# Altium PCB W25 Chipset - 1GBiT SPI.PcbDoc
Units mm, origin at the board's own origin, x right, y up, seen from the top; angles counter-clockwise.
Board outline 30.95 x 25.24 mm, 2 copper layers (Top Layer, Bottom Layer); 9 components, 13 nets, 38 pads, 6 vias.
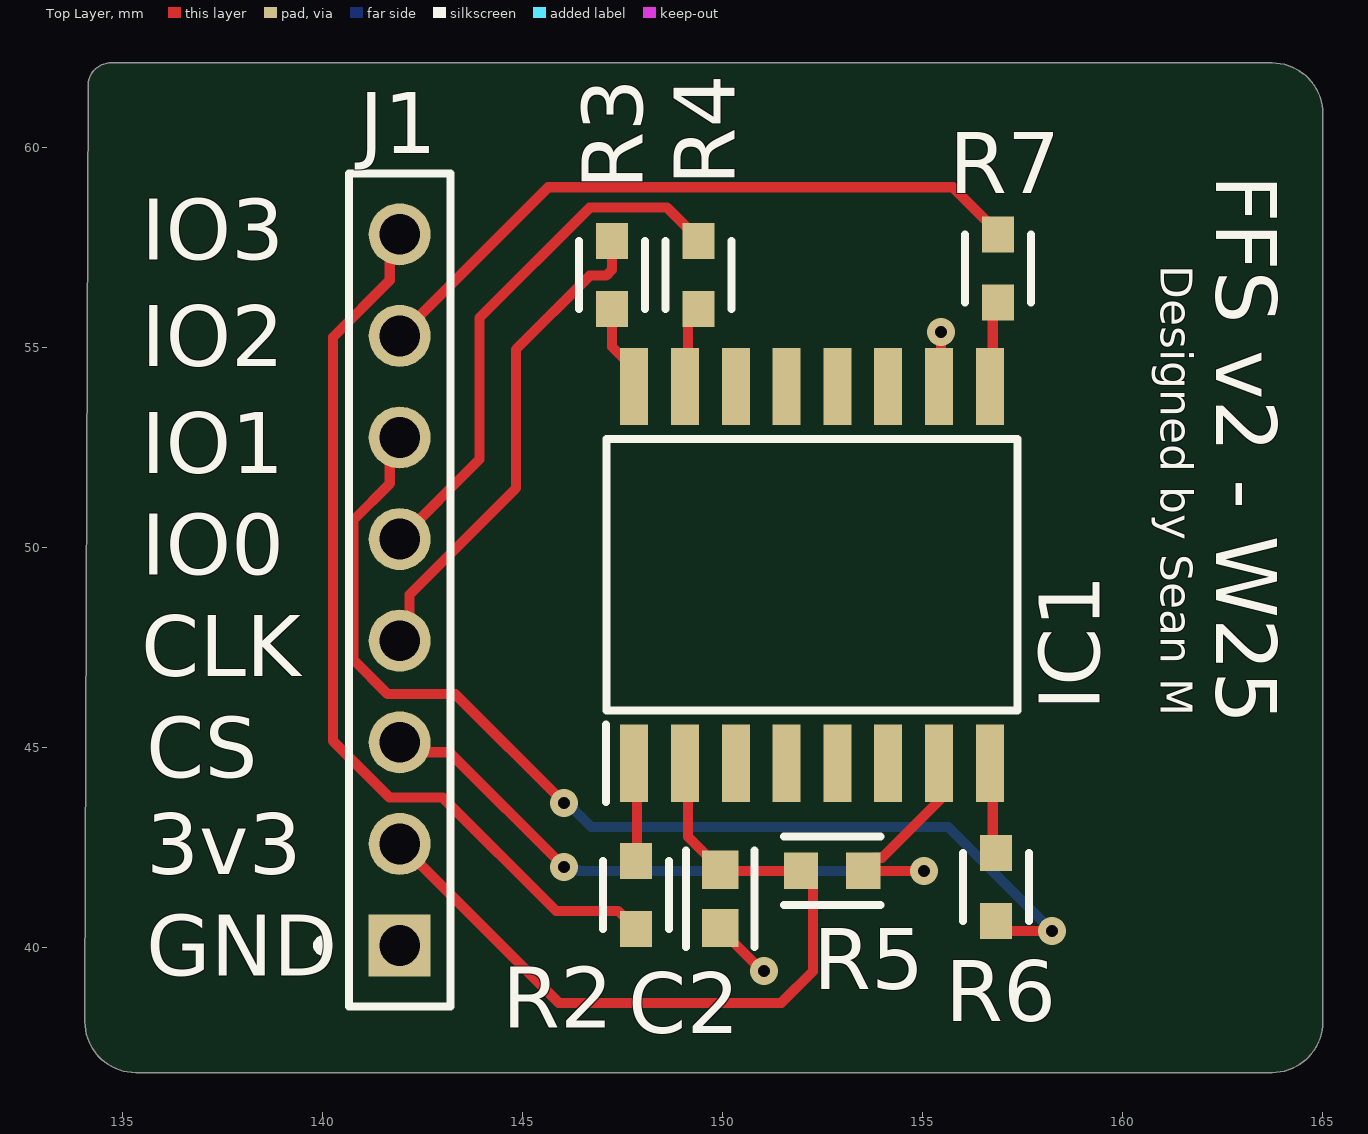
[diagram p0: Top Layer view]
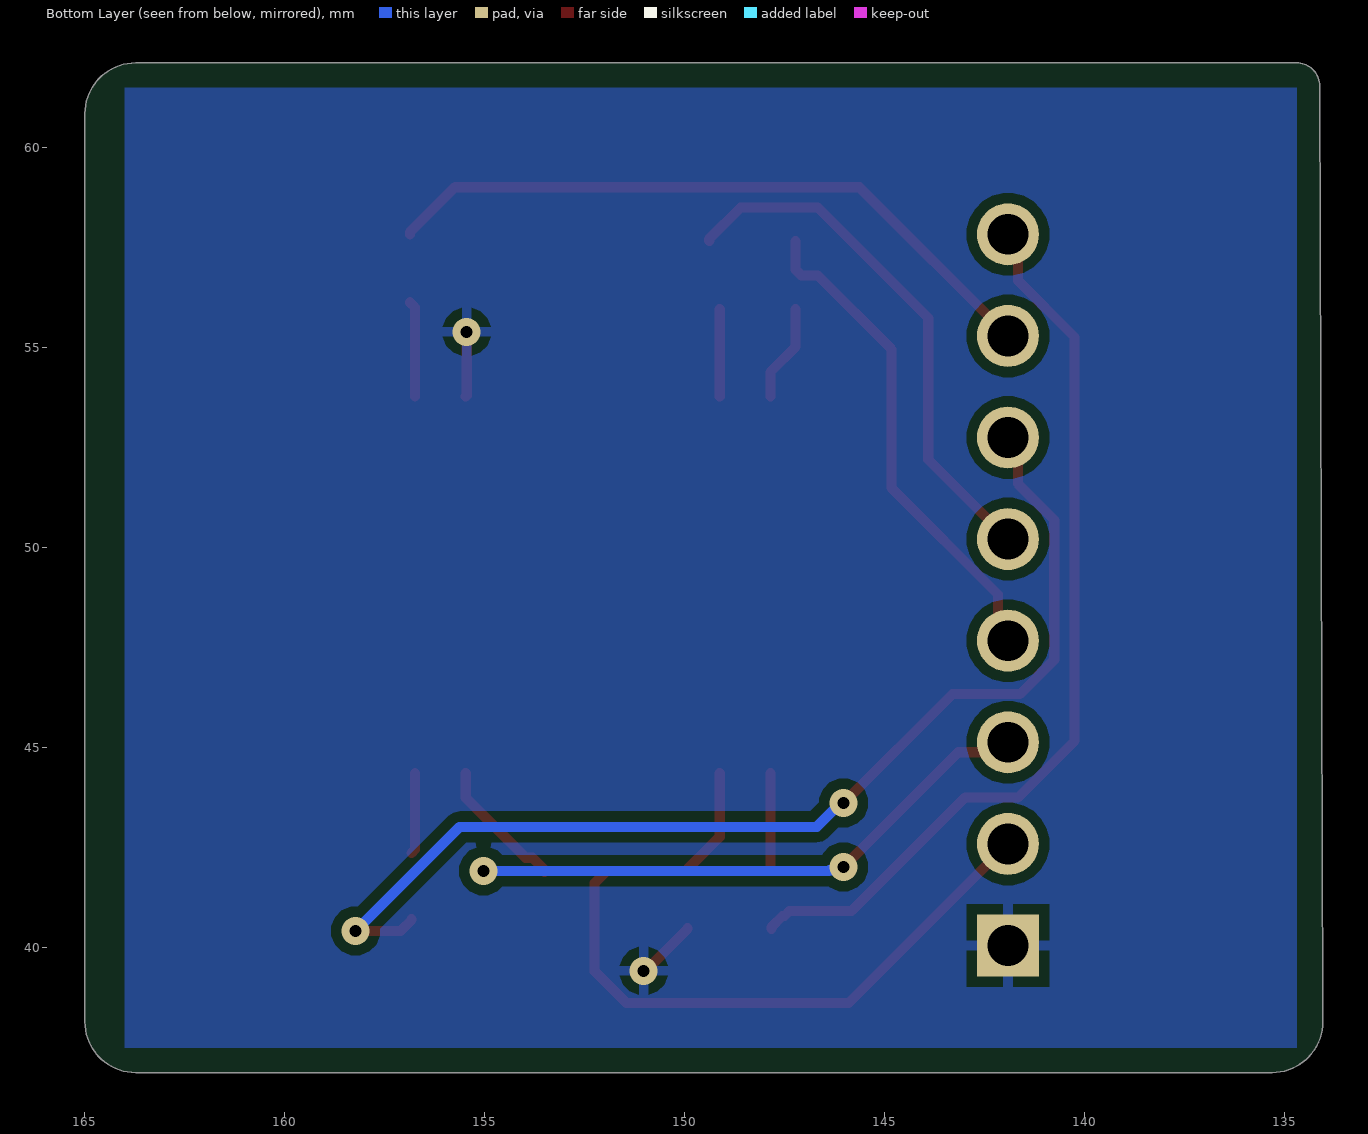
[diagram p1: Bottom Layer view, seen from below]
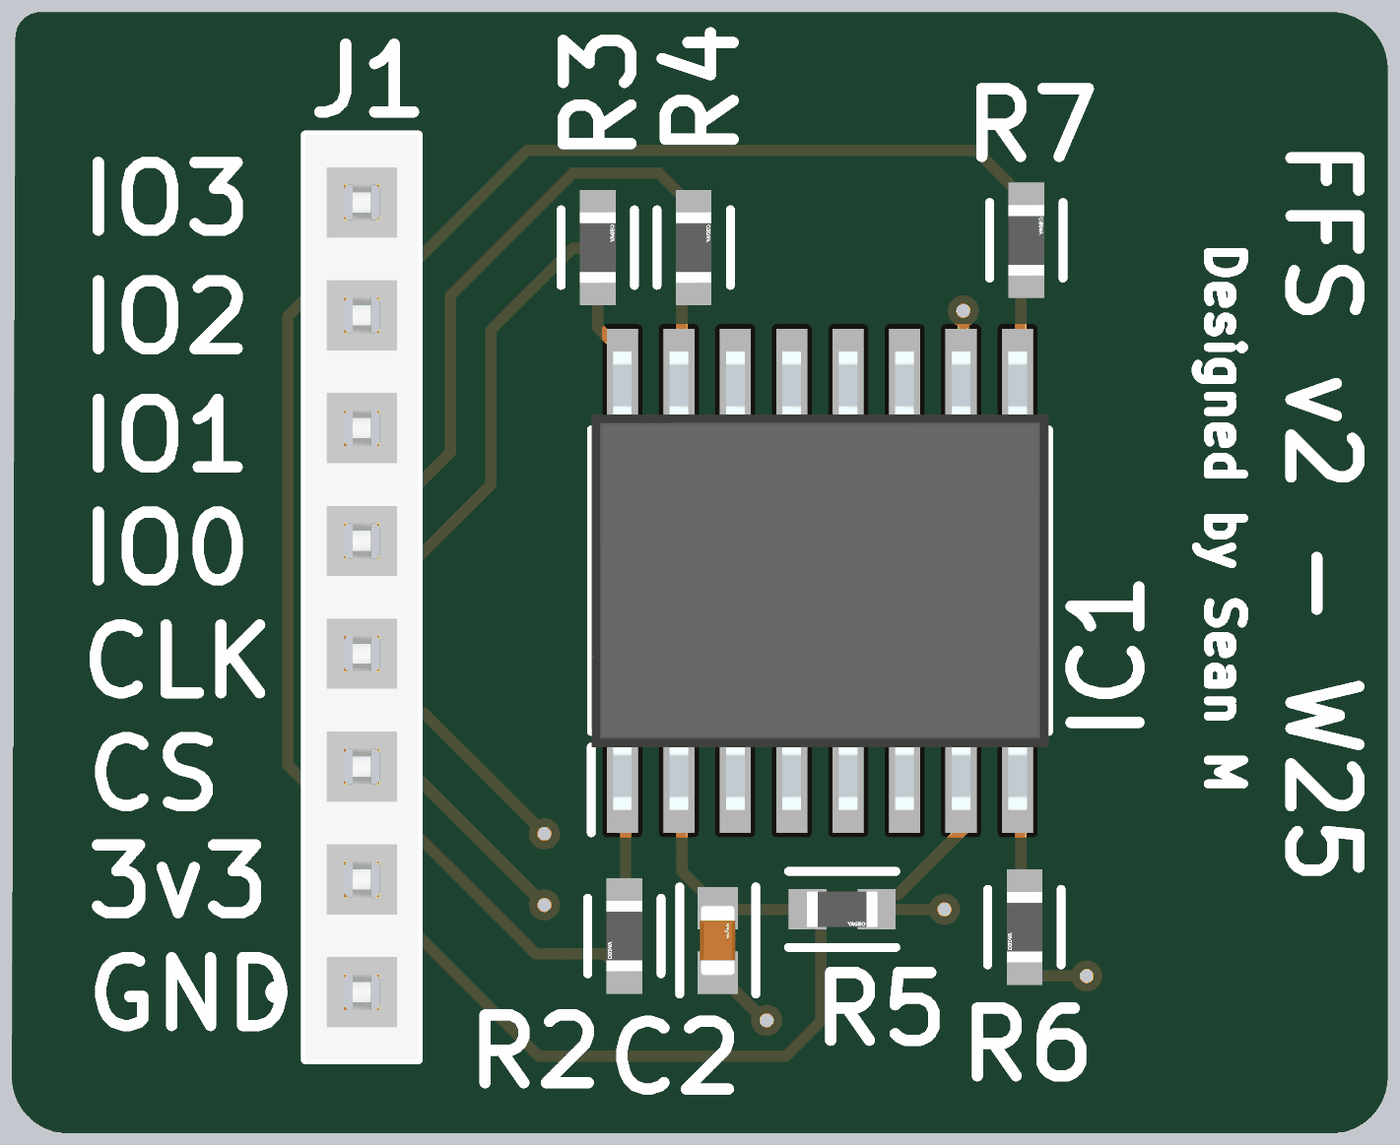
[diagram p2: 3D render of the assembled board from above, using the file's embedded part models]

## Layer stack, top to bottom
Top Solder: solder mask 0.0102, Solder Resist, Dk 3.5
Top Layer: signal copper 0.0356
Dielectric 1: dielectric 0.32, FR-4, Dk 4.8
Bottom Layer: signal copper 0.0356
Bottom Solder: solder mask 0.0102, Solder Resist, Dk 3.5

## Board outline
134.052,38.149 ccw(c135.322,38.149) 135.322,36.879 163.73,36.879 ccw(c163.73,38.149) 165,38.149 165,60.851 ccw(c163.73,60.851) 163.73,62.121 134.701,62.121 ccw(c134.701,61.551) 134.131,61.551 134.052,38.598

## Design rules (kind name [scope] priority, off if disabled: settings)
Clearance [All] p1: gap=0.254 ignorepadtopadclearanceinfootprint=FALSE ismatrix=TRUE
HoleSize [All] p1: absolutevalues=TRUE maxlimit=2.54 minlimit=0.003 maxpercent=80.000 minpercent=20.000
PolygonConnect [All] p1: connectstyle=Relief reliefconductorwidth=0.254 reliefentries=4 polygonreliefangle="90 Angle" airgapwidth=0.254
RoutingVias [All] p1: holewidth=0.711 width=1.27 viastyle="Through Hole" minholewidth=0.711 minwidth=1.27 maxholewidth=0.711 maxwidth=1.27
SolderMaskExpansion [All] p1: expansion=0.102 istentingtop=FALSE
Width [All] p1: maxlimit=0.254 minlimit=0.254 preferedwidth=0.254
29 further rules are at their usual default settings.

## Classes and differential pairs
component class "W25 Chipset - 1GBiT SPI": C2 IC1 J1 R2 R3 R5 R6 R7

## Components (designator, comment, footprint, x,y, rotation, side; value= is the part's Value field where it differs from the comment)
C2 "GCM188R71" FP-GCM188-0_1-IPC_B 149.931,41.221 r90 top
IC1 "W25N01GVSFIG" SOIC127P1032X264-16N 152.231,49.321 r90 top
J1 "PPPC081LFBN-RC" SLIN-PPPC081LFBN-RC_V 141.923,48.946 r90 top
R2 "AC0603FR-0710RL" FP-AC0603-MFG 147.831,41.321 r270 top
R3 "AC0603FR-0710RL" FP-AC0603-MFG 147.231,56.821 r90 top
R4 "AC0603FR-0710RL" FP-AC0603-MFG 149.39,56.821 r90 top
R5 "AC0603FR-07910KL" FP-AC0603-IPC_B 152.731,41.921 r0 top
R6 "AC0603FR-0710RL" FP-AC0603-MFG 156.831,41.521 r270 top
R7 "AC0603FR-0710RL" FP-AC0603-MFG 156.875,56.985 r90 top

## Footprints (in the part's own frame and the unit in brackets; to place one, negate y for a bottom-side part, rotate by r counter-clockwise, add the part's x,y. Pads: shape width x height; smd on the part's side, far side on the other; paste and mask are expansions set on the pad)
FP-AC0603-IPC_B [mm]
  rect 0.859x0.912 smd paste+0 mask+0: 1(-0.777,0) 2(0.777,0)
  silkscreen extent -1.21,-0.86 1.21,0.86, body extent -1.46,-0.71 1.46,0.71, height 0.25
FP-AC0603-MFG [mm]
  rect 0.9x0.8 smd paste+0 mask+0: 1(-0.85,0) 2(0.85,0)
  silkscreen extent -0.85,-0.82 0.85,0.82, body extent -1.4,-0.55 1.4,0.55, height 0.25
FP-GCM188-0_1-IPC_B [mm]
  rect 0.959x0.912 smd paste+0 mask+0: 1(-0.727,0) 2(0.727,0)
  silkscreen extent -1.21,-0.86 1.21,0.86, body extent -1.46,-0.71 1.46,0.71, height 0.25
SLIN-PPPC081LFBN-RC_V [mm] "THD, 8-Leads, Body 20.82x2.54mm, Pitch 2.54mm"
  rect 1.55x1.55 hole 1.02: 1(-8.89,0)
  round 1.55 hole 1.02: 2(-6.35,0) 3(-3.81,0) 4(-1.27,0) 5(1.27,0) 6(3.81,0) 7(6.35,0) 8(8.89,0)
  silkscreen extent -10.41,-1.27 10.41,2.04, body extent -10.41,-1.27 10.41,1.27, height 8.5
SOIC127P1032X264-16N [mm]
  rect 1.93x0.7 smd: 1(-4.71,4.445) 2(-4.71,3.175) 3(-4.71,1.905) 4(-4.71,0.635) 5(-4.71,-0.635) 6(-4.71,-1.905) 7(-4.71,-3.175) 8(-4.71,-4.445) 9(4.71,-4.445) 10(4.71,-3.175) 11(4.71,-1.905) 12(4.71,-0.635) 13(4.71,0.635) 14(4.71,1.905) 15(4.71,3.175) 16(4.71,4.445)
  silkscreen extent -5.68,-5.14 3.39,5.15, body extent -5.16,-5.14 5.16,5.14, height 2.64

## Part data
C2: library part CMP-2006-02357-2, "Ceramic Capacitor for Automotive 1uF  ±10% 16VDC X7R 0603 Paper T/R", Capacitance=1uF, Case Code (Imperial)=0603, Case Code (Metric)=1608, Dielectric=X7R, Max Operating Temperature=125°C, Min Operating Temperature=-55°C, Package Quantity=1, Ratings=AEC-Q200, Tolerance=10%, Voltage=16V, Case/Package=0603, Depth=0.8mm, Height=0.8mm, Lead Free="Lead Free", Length=1.6mm, Mount="Surface Mount", Packaging="Tape and Reel", Radiation Hardening=No, REACH SVHC="No SVHC", Termination=SMD/SMT, Thickness=0.035inch, Voltage Rating=16V, Voltage Rating (DC)=16V, Width=0.031inch
IC1: "Integrated Circuit", Manufacturer_Name=Winbond, Mouser Part Number=454-W25N01GVSFIG, Arrow Part Number=W25N01GVSFIG, Arrow Price/Stock=https://www.arrow.com/en/products/w25n01gvsfig/winbond-electronics?region=nac, Datasheet Link=https://www.winbond.com/hq/search-resource-file.jsp?partNo=W25N01GVSFIG&type=datasheet, Height=2.64mm, Manufacturer_Part_Number=W25N01GVSFIG, Mouser Price/Stock=https://www.mouser.co.uk/ProductDetail/Winbond/W25N01GVSFIG?qs=qSfuJ%252Bfl%2Fd5wRcUOkRc5Cw%3D%3D
J1: library part CMP-002-00028-2, "Female Header, Pitch 2.54 mm, 1 x 8 Position, Height 8.5 mm, Tail Length 3.2 mm, -40 to 105 degC, RoHS, Bulk", Manufacturer=Sullins, Max Operating Temperature=105°C, Min Operating Temperature=-40°C, Package Description="Female Header, Pitch 2.54 mm, 1 x 8 Position, Height 8.5 mm, Tail Length 3.2 mm", Case/Package=PPPC081LFBN-RC, Connector Type=Header, Datasheet URL=http://sullinscorp.com/catalogs/101_PAGE114-115_.100_FEMALE_HDR.pdf, Datasheet Version=Jan-15, Gender=Female, Mounting Technology=TH, Package Reference=PPPC081LFBN-RC, RoHS Compliant=Unknown
R2 R3 R4 R6 R7: library part CMP-2000-04819-3, "RES 10Ω 1.00% 0.1W 0603", Case Code (Imperial)=0603, Case Code (Metric)=1608, Max Operating Temperature=155°C, Max Power Dissipation=100mW, Min Operating Temperature=-55°C, Package Quantity=1, Resistance=10R, Resistor Type="Thick Film", Temperature Coefficient=200ppm/°C, Tolerance=1%, Voltage Rating=50V, Working Voltage=75V, Case/Package=0603, Features="Moisture Resistant", Height=0.022inch, Lead Free="Lead Free", Length=0.063inch, Moisture Sensitivity Level=1, Number of Terminations=2, Packaging="Tape and Reel", Power Rating=100mW, RoHS Compliant=Yes, Series=AC, Technology="THICK FILM", Termination=SMD/SMT, Width=0.031inch
R5: library part CMP-03412-028406-2, "RES 910KΩ 1.00% 0.1W 0603", Case Code (Imperial)=0603, Case Code (Metric)=1608, Max Operating Temperature=155°C, Max Power Dissipation=100mW, Min Operating Temperature=-55°C, Resistance=910kR, Resistor Type="Thick Film", Temperature Coefficient=100ppm/°C, Tolerance=1%, Voltage Rating=50V, Case/Package=0603, Features="Moisture Resistant", Height=0.022inch, Length=0.063inch, Number of Terminations=2, Packaging="Tape and Reel", Power Rating=100mW, RoHS Compliant=Yes, Series=AC, Termination=SMD/SMT, Width=0.8mm

## Via types
v1: diameter 0.7, hole 0.3, Top Layer to Bottom Layer, tented both sides, 6 vias

## Nets (pads, with @x,y where several pads share a name; then routed paths per layer and width w, separated by ;. In a path a pad name is that pad's centre, name@x,y a point inside that pad or via, vN(x,y) a via of type N, cw(c..) or ccw(c..) an arc to the next point about the centre after c; other vN are vias at no path point)
+3v3: C2.2 IC1.2 J1.2 R5.1 | length 19.7
  Top Layer w0.254: J1.2 145.898,38.621 151.465,38.621 152.256,39.412 152.256,41.62 R5.1 149.958,41.921 C2.2 149.931,41.971 149.128,42.774 IC1.2@149.128,44.362
CLK: J1.4 R3.2 | length 12.4
  Top Layer w0.254: J1.4 142.171,47.924 142.171,48.829 144.831,51.489 144.831,54.96 146.673,56.802 147.082,56.802 147.231,56.951 R3.2
CS: IC1.7 J1.3 R5.2 | length 19.3
  Top Layer w0.254: J1.3 142.171,44.888 143.164,44.888 v1(146.031,42.021) ; R5.2@153.508,41.894 153.535,41.921 v1(155.031,41.921) ; R5.2@153.508,41.948 153.81,42.25 153.981,42.25 155.478,43.747 IC1.7@155.478,44.362
  Bottom Layer w0.254: v1(146.031,42.021) 146.117,41.936 146.388,41.936 146.403,41.921 v1(155.031,41.921)
GND: C2.1 IC1.10 J1.1 | length 3.2
  Top Layer w0.254: C2.1 149.931,40.471 150.981,39.421 v1(151.031,39.421) ; v1(155.455,55.398) 155.455,53.806 IC1.10@155.478,53.782
IO0: J1.5 R4.2 | length 13.3
  Top Layer w0.254: J1.5 143.914,52.207 143.914,55.743 146.673,58.502 148.609,58.502 149.39,57.721 R4.2
IO1: J1.6 R6.2 | length 28.2
  Top Layer w0.254: J1.6@142.171,52.508 J1.6 141.675,52.508 141.675,51.603 140.767,50.695 140.767,47.197 141.623,46.341 143.311,46.341 v1(146.031,43.621) ; R6.2@156.831,40.721 156.831,40.694 157.104,40.421 v1(158.231,40.421)
  Bottom Layer w0.254: v1(146.031,43.621) 146.103,43.621 146.703,43.021 155.631,43.021 v1(158.231,40.421)
IO2: J1.7 R7.2 | length 17
  Top Layer w0.254: J1.7 145.637,59.01 155.75,59.01 156.875,57.885 R7.2
IO3: J1.8 R2.2 | length 22.9
  Top Layer w0.254: J1.8 141.675,57.588 141.675,56.683 140.259,55.267 140.259,45.165 141.672,43.752 143,43.752 145.831,40.921 147.381,40.921 147.508,40.794 147.558,40.794 147.831,40.521 R2.2
NetIC1_1: IC1.1 R2.1 | length 2.3
  Top Layer w0.254: R2.1@147.858,42.048 IC1.1@147.858,44.362
NetIC1_8: IC1.8 R6.1 | length 2
  Top Layer w0.254: IC1.8@156.748,44.362 156.748,42.454 R6.1
NetIC1_9: IC1.9 R7.1 | length 2.4
  Top Layer w0.254: IC1.9@156.748,53.782 156.748,56.008 R7.1
NetIC1_15: IC1.15 R4.1 | length 2.2
  Top Layer w0.254: IC1.15@149.128,53.782 R4.1@149.128,55.969
NetIC1_16: IC1.16 R3.1 | length 2.4
  Top Layer w0.254: R3.1 147.231,55.024 147.858,54.397 IC1.16@147.858,53.782
pads on no net: IC1.3 IC1.4 IC1.5 IC1.6 IC1.11 IC1.12 IC1.13 IC1.14

## Polygon pours and split planes (outlines as drawn)
GND on Bottom Layer "GND_L02_P000" (solid, pour order 0): 134.7,61.5 135,61.5 164,61.5 164,37.5 163.9,37.5 163.7,37.5 134.7,37.5

## Silkscreen, mask and mechanical layers (free items; w line width, h text height)
Top Overlay:
  text "FFS v2 - W25" at 162.331,59.321 h1.52 r270
  text "IO3" at 135.465,57.201 h1.52
  text "Designed by Sean M" at 160.952,57.067 h0.8 r270
  text "IO2" at 135.465,54.534 h1.52
  text "IO1" at 135.465,51.867 h1.52
  text "IO0" at 135.465,49.327 h1.52
  text "CLK" at 135.465,46.787 h1.52
  text "CS" at 135.592,44.247 h1.52
  text "3v3" at 135.592,41.834 h1.52
  text "GND" at 135.592,39.294 h1.52
Mechanical 1:
  lines w0.254: 134.052,38.149 ccw(c135.322,38.149) 135.322,36.879 135.515,36.879 163.73,36.879 ccw(c163.73,38.149) 165,38.149 165,60.851 ccw(c163.73,60.851) 163.73,62.121 134.701,62.121 ccw(c134.701,61.551) 134.131,61.551 134.052,38.598 134.052,38.149